# Altium PCB STM32.PcbDoc (part 2 of 6)
Units mm, origin at the board's own origin, x right, y up, seen from the top; angles counter-clockwise.
Board outline 99.69 x 99.7 mm, 2 copper layers (Top Layer, Bottom Layer); 150 components, 142 nets, 668 pads, 273 vias.
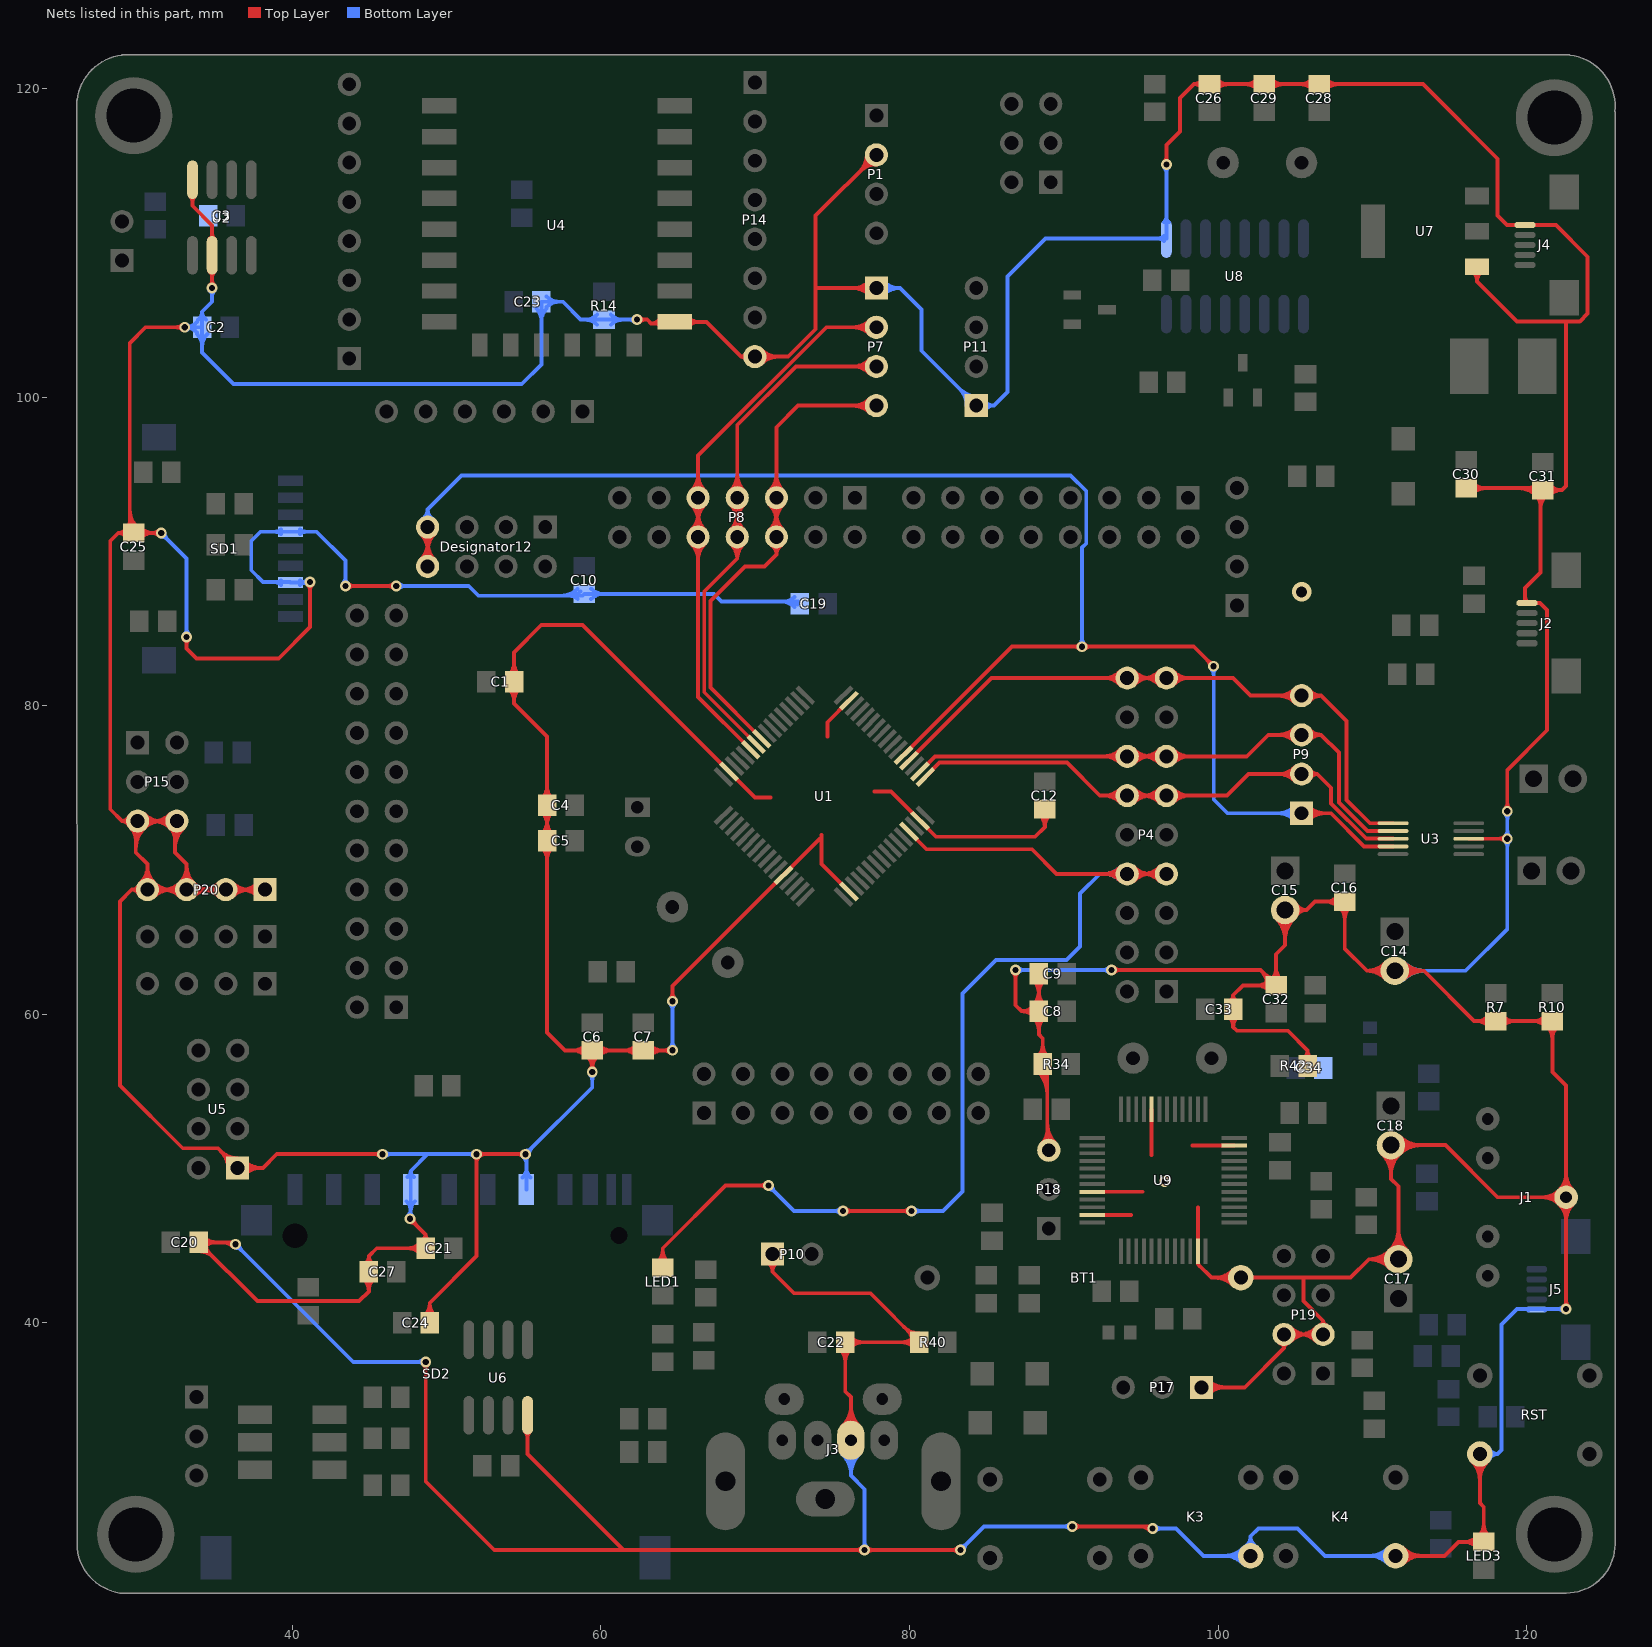
[diagram p2: the nets of this part, all layers, seen from the top]

## Via types
v1: diameter 0.7, hole 0.4, Top Layer to Bottom Layer, 272 vias
v2: diameter 1.27, hole 0.711, Top Layer to Bottom Layer, 1 vias

## Nets (pads, with @x,y where several pads share a name; then routed paths per layer and width w, separated by ;. In a path a pad name is that pad's centre, name@x,y a point inside that pad or via, vN(x,y) a via of type N, cw(c..) or ccw(c..) an arc to the next point about the centre after c; other vN are vias at no path point) (continued)
GND: BT1.2 C1.2 C2.2 C3.1 C4.1 C5.1 C6.1 C7.1 C8.1 C9.1 C10.2 C12.2 C14.2 C15.2 C16.2 C17.2 C18.2 C19.2 C20.1 C21.2 C22.1 C23.2 C24.2 C25.2 C26.2 C27.2 C28.1 C29.1 C30.1 C31.1 C32.1 C33.1 C34.1 J1.1 J2.4 J3.3 J4.4 J5.4 K3.1 K4.1 LED3.2 P1.2 P7.1 P10.1 P11.1 P14.8 P15.5 P15.6 P17.1 P18.3 P19.3 P19.4 P20.1 P20.2 P20.3 P20.4 R7.1 R10.1 R14.1 R34.1 R40.1 R42.1 RST.2 SD1.3 SD1.6 SD2.3 SD2.6 U1.12 U1.18 U1.31 U1.47 U1.63 U2.2 U2.8 U3.8 U4.8 U5.1 U6.4 U7.1 U8.1 U9.8 U9.20 U9.23 U9.35 U9.47 | length 1223.3
  Top Layer w0.25: C25.2@29.227,90.927 ccw(c28.713,90.573) 28.713,91.197 ; C25.2@29.227,91.467 cw(c28.713,91.822) 28.713,91.197 ; C25.2@29.282,91.533 ccw(c28.843,91.972) 29.464,91.972 ; P15.5@29.414,72.235 ccw(c28.956,72.004) 28.956,72.517 ; P15.5@29.414,72.799 cw(c28.956,73.03) 28.956,72.517 ; 29.464,92.112 ccw(c30.533,92.112) C25.2@29.777,91.356 ; 29.464,92.716 ccw(c31.137,92.716) C25.2@29.954,91.533 ; P15.5@29.53,72.075 cw(c28.77,71.315) 29.845,71.315 ; 29.845,70.701 cw(c31.787,70.701) 30.414,72.075 cw(c31.481,71.008) 31.481,72.517 cw(c31.481,74.026) P15.5@30.414,72.959 ; 29.845,71.305 cw(c31.184,71.305) 30.237,72.252 cw(c30.877,71.612) 30.877,72.517 cw(c30.877,73.422) P15.5@30.237,72.782 ; P20.4@30.049,67.79 ccw(c29.591,67.559) 29.591,68.072 ; P20.4@30.049,68.354 cw(c29.591,68.585) 29.591,68.072 ; C25.2@30.154,90.861 cw(c30.938,90.077) 30.938,91.186 ; C25.2@30.154,91.533 ccw(c30.991,92.37) 30.991,91.186 ; P20.4@30.165,68.514 ccw(c29.098,69.581) 30.607,69.581 ccw(c32.116,69.581) 31.049,68.514 ccw(c32.116,69.581) 32.116,68.072 ccw(c32.116,66.563) P20.4@31.049,67.63 ; P20.4@30.342,68.337 ccw(c29.702,68.977) 30.607,68.977 ccw(c31.512,68.977) 30.872,68.337 ccw(c31.512,68.977) 31.512,68.072 ccw(c31.512,67.167) P20.4@30.872,67.807 ; v1@31.337,91.027 ccw(c30.953,90.643) 30.953,91.186 ccw(c30.953,91.729) v1@31.337,91.345 ; v1(31.496,91.186) 29.729,91.186 C25.2@29.718,91.197 ; P15.6@32.07,72.959 cw(c31.003,74.026) 31.003,72.517 cw(c31.003,71.008) 32.07,72.075 cw(c31.31,71.315) 32.385,71.315 ; P15.6@32.247,72.252 ccw(c31.607,71.612) 31.607,72.517 ccw(c31.607,73.422) P15.6@32.247,72.782 ; 32.385,70.701 cw(c34.327,70.701) P15.6@32.954,72.075 ; 32.385,71.305 cw(c33.724,71.305) P15.6@32.777,72.252 ; P20.3@32.705,67.63 ccw(c31.638,66.563) 31.638,68.072 ccw(c31.638,69.581) 32.705,68.514 ccw(c31.638,69.581) 33.147,69.581 ccw(c34.656,69.581) 33.589,68.514 ccw(c34.656,69.581) 34.656,68.072 ccw(c34.656,66.563) P20.3@33.589,67.63 ; v1@32.861,104.362 ccw(c32.477,103.978) 32.477,104.521 ccw(c32.477,105.064) v1@32.861,104.68 ; P20.3@32.882,67.807 ccw(c32.242,67.167) 32.242,68.072 ccw(c32.242,68.977) 32.882,68.337 ccw(c32.242,68.977) 33.147,68.977 ccw(c34.052,68.977) 33.412,68.337 ccw(c34.052,68.977) 34.052,68.072 ccw(c34.052,67.167) P20.3@33.412,67.807 ; v1@32.988,84.296 cw(c32.604,83.912) 33.147,83.912 cw(c33.69,83.912) v1@33.306,84.296 ; v1(33.02,104.521) 30.48,104.521 29.464,103.505 29.464,91.451 C25.2@29.718,91.197 ; v1(33.147,84.455) 33.147,83.693 33.782,83.058 39.116,83.058 41.148,85.09 v1(41.148,88.011) ; U2.8@33.369,113.024 cw(c32.985,112.64) 33.528,112.64 cw(c34.071,112.64) U2.8@33.687,113.024 ; U2.8@33.528,114.083 33.528,112.395 34.798,111.125 U2.2@34.798,109.183 v1(34.798,107.061) ; C20.1@33.92,44.637 cw(c33.92,43.249) 34.902,44.23 ; C20.1@33.92,44.887 cw(c33.92,44.102) C20.1@34.475,44.657 ; C20.1@34.256,44.876 cw(c35.067,44.065) 35.067,45.212 cw(c35.067,46.359) C20.1@34.256,45.548 ; C20.1@34.395,45.112 ccw(c35.3,45.112) 34.66,44.472 ; v1@34.639,107.22 ccw(c34.255,107.604) 34.798,107.604 ccw(c35.341,107.604) v1@34.957,107.22 ; U2.2@34.639,108.124 cw(c34.255,107.74) 34.798,107.74 cw(c35.341,107.74) U2.2@34.957,108.124 ; U2.2@34.639,110.242 ccw(c34.255,110.626) 34.798,110.626 ccw(c35.341,110.626) U2.2@34.957,110.242 ; P20.2@35.245,67.63 ccw(c34.178,66.563) 34.178,68.072 ccw(c34.178,69.581) P20.2@35.245,68.514 ; P20.2@35.422,67.807 ccw(c34.782,67.167) 34.782,68.072 ccw(c34.782,68.977) P20.2@35.422,68.337 ; 35.472,45.212 cw(c35.472,44.235) v1@36.163,44.926 ; U5.1@35.824,50.038 ccw(c34.315,50.038) 35.382,51.105 ccw(c36.449,52.172) U5.1@36.449,50.663 ; P20.2@35.952,67.807 cw(c36.592,67.167) 36.592,68.072 cw(c36.592,68.977) P20.2@35.952,68.337 ; U5.1@36.074,50.038 ccw(c35.169,50.038) 35.809,50.678 ccw(c36.449,51.318) U5.1@36.449,50.413 ; P20.2@36.129,67.63 cw(c37.196,66.563) 37.196,68.072 cw(c37.196,69.581) P20.2@36.129,68.514 ; v1(36.322,45.085) 36.195,45.212 C20.1@33.92,45.212 37.73,41.402 44.323,41.402 44.958,42.037 ; U5.1@36.714,49.773 cw(c37.354,49.133) 37.354,50.038 cw(c37.354,50.943) U5.1@36.714,50.303 ; U5.1@36.891,49.596 cw(c37.958,48.529) 37.958,50.038 cw(c37.958,51.547) U5.1@36.891,50.48 ; P20.1@37.785,67.63 ccw(c36.718,66.563) 36.718,68.072 ccw(c36.718,69.581) P20.1@37.785,68.514 ; P20.1@37.962,67.807 ccw(c37.322,67.167) 37.322,68.072 ccw(c37.322,68.977) P20.1@37.962,68.337 ; P20.1@38.227,68.072 P20.2@35.687,68.072 P20.3@33.147,68.072 ; v1@40.989,87.852 cw(c40.605,87.468) 41.148,87.468 cw(c41.691,87.468) v1@41.307,87.852 ; v1(43.434,87.757) v1(46.736,87.757) ; v1@43.593,87.598 cw(c43.977,87.214) 43.977,87.757 cw(c43.977,88.3) v1@43.593,87.916 ; C27.2@44.612,42.87 cw(c43.782,42.037) 44.958,42.037 ; C27.2@44.681,43.8 ccw(c44.327,44.323) 44.958,44.323 ; C27.2@44.947,43.307 C27.2@44.958,43.318 ; 44.958,42.087 cw(c46.067,42.087) C27.2@45.283,42.871 ; C27.2@45.228,43.79 cw(c45.619,44.323) 44.958,44.323 ; v1@45.688,50.768 ccw(c45.304,50.384) 45.304,50.927 ccw(c45.304,51.47) v1@45.688,51.086 ; v1(45.847,50.927) 38.989,50.927 38.1,50.038 U5.1@36.449,50.038 35.179,51.308 32.893,51.308 28.829,55.372 28.829,67.31 29.591,68.072 ; v1@46.577,87.598 ccw(c46.193,87.214) 46.193,87.757 ccw(c46.193,88.3) v1@46.577,87.916 ; v1@47.625,46.511 cw(c47.625,45.968) 48.009,46.352 cw(c48.393,46.736) v1@47.85,46.736 ; v1(47.625,46.736) 48.63,45.731 ; C21.2@48.294,44.495 ccw(c47.483,43.684) 47.483,44.831 ccw(c47.483,45.978) C21.2@48.294,45.167 ; C21.2@48.403,45.348 ccw(c48.194,45.731) 48.63,45.731 ; v1@48.482,37.306 cw(c48.098,36.922) 48.641,36.922 cw(c49.184,36.922) v1@48.8,37.306 ; C24.2@48.57,40.441 ccw(c47.759,41.252) 48.906,41.252 ccw(c50.053,41.252) C24.2@49.242,40.441 ; v1(48.641,37.465) 48.641,29.718 53.086,25.273 61.468,25.273 ; C21.2@48.857,45.348 cw(c49.066,45.731) 48.63,45.731 ; C24.2@48.906,40.005 48.906,41.286 51.943,44.323 v1(51.943,50.927) v1(55.118,50.927) ; v1@51.784,50.768 cw(c51.4,50.384) 51.943,50.384 cw(c52.486,50.384) 52.102,50.768 cw(c52.486,50.384) 52.486,50.927 cw(c52.486,51.47) v1@52.102,51.086 ; C1.2@54.031,81.098 cw(c53.22,80.287) 54.367,80.287 cw(c55.514,80.287) C1.2@54.703,81.098 ; C1.2@54.031,81.97 ccw(c53.22,82.781) 54.367,82.781 ccw(c55.514,82.781) C1.2@54.703,81.97 ; v1@54.959,50.768 ccw(c54.575,50.384) 54.575,50.927 ccw(c54.575,51.47) v1@54.959,51.086 ; U6.4@55.086,32.94 cw(c54.702,32.556) 55.245,32.556 cw(c55.788,32.556) U6.4@55.404,32.94 ; U6.4@55.245,33.999 55.245,31.496 61.468,25.273 ; C5.1@56.168,70.811 cw(c55.357,70) 56.504,70 cw(c57.651,70) C5.1@56.84,70.811 ; C5.1@56.168,71.683 ccw(c55.357,72.494) 56.504,72.494 ccw(c57.651,72.494) C5.1@56.84,71.683 ; C4.1@56.168,73.097 cw(c55.357,72.286) 56.504,72.286 cw(c57.651,72.286) C4.1@56.84,73.097 ; C4.1@56.168,73.969 ccw(c55.357,74.78) 56.504,74.78 ccw(c57.651,74.78) C4.1@56.84,73.969 ; C6.1@59,57.311 ccw(c58.189,56.5) 58.189,57.647 ccw(c58.189,58.794) C6.1@59,57.983 ; C6.1@59.1,57.311 cw(c58.289,56.5) 59.436,56.5 cw(c60.583,56.5) C6.1@59.772,57.311 ; v1@59.277,56.42 ccw(c58.893,56.804) 59.436,56.804 ccw(c59.979,56.804) v1@59.595,56.42 ; v1(59.436,56.261) C6.1@59.436,57.647 ; C6.1@59.872,57.311 cw(c60.683,56.5) 60.683,57.647 cw(c60.683,58.794) C6.1@59.872,57.983 ; C7.1@62.302,57.311 ccw(c61.491,56.5) 61.491,57.647 ccw(c61.491,58.794) C7.1@62.302,57.983 ; v1(62.346,105.018) 63.003,105.018 63.246,104.775 ; v1@62.505,104.859 cw(c62.889,104.475) 62.889,105.018 cw(c62.889,105.561) v1@62.505,105.177 ; C7.1@63.174,57.311 cw(c63.985,56.5) 63.985,57.647 cw(c63.985,58.794) C7.1@63.174,57.983 ; 63.478,104.775 cw(c63.478,104.201) U4.8@63.884,104.607 ; U4.8@63.841,105.086 cw(c63.246,105.5) 63.246,104.775 ; 64.073,57.647 ccw(c64.073,58.228) v1@64.484,57.817 ; 64.126,57.647 cw(c64.126,57.141) v1@64.484,57.499 ; v1@64.484,60.992 ccw(c64.1,61.376) 64.643,61.376 ccw(c65.186,61.376) v1@64.802,60.992 ; v1(64.643,57.658) 64.632,57.647 C7.1@62.738,57.647 C6.1@59.436,57.647 ; v1(64.643,60.833) 64.643,61.818 U1.12@71.834,69.009 74.168,71.343 ; U4.8@64.677,104.775 63.246,104.775 ; U4.8@64.774,104.872 66.832,104.872 69.088,102.616 ; U4.8@65.664,104.607 cw(c66.304,103.967) 66.304,104.872 cw(c66.304,105.777) U4.8@65.664,105.137 ; P14.8@69.389,102.404 ccw(c69.088,102.296) 69.088,102.616 ; P14.8@69.389,102.828 cw(c69.088,102.936) 69.088,102.616 ; P14.8@70.242,102.351 cw(c70.882,101.711) 70.882,102.616 cw(c70.882,103.521) P14.8@70.242,102.881 ; P14.8@70.419,102.174 cw(c71.486,101.107) 71.486,102.616 cw(c71.486,104.125) P14.8@70.419,103.058 ; P10.1@70.783,43.924 cw(c70.387,43.307) 71.12,43.307 ; 70.993,74.041 69.984,74.041 U1.63@68.299,75.726 58.808,85.217 56.134,85.217 54.367,83.45 54.367,80.126 56.504,77.989 C4.1@56.504,73.533 C5.1@56.504,71.247 56.504,58.812 57.669,57.647 C6.1@59.436,57.647 ; P10.1@71.12,44.45 71.12,43.307 ; P10.1@71.457,43.924 ccw(c71.853,43.307) 71.12,43.307 ; 73.914,107.061 P7.1@77.851,107.061 ; 74.295,71.628 74.295,69.73 U1.18@76.077,67.948 ; 74.676,77.978 74.676,78.922 U1.47@76.077,80.323 ; C22.1@75.494,38.299 cw(c74.683,37.488) 75.83,37.488 cw(c76.977,37.488) C22.1@76.166,38.299 ; J3.3@75.66,33.306 ccw(c74.356,34.61) 76.2,34.61 ccw(c78.044,34.61) J3.3@76.74,33.306 ; J3.3@75.837,33.129 ccw(c74.959,34.007) 76.2,34.007 ccw(c77.441,34.007) J3.3@76.563,33.129 ; C22.1@76.166,38.399 cw(c76.977,37.588) 76.977,38.735 cw(c76.977,39.882) C22.1@76.166,39.071 ; J3.3@76.2,32.385 76.2,35.179 75.83,35.549 C22.1@75.83,38.735 R40.1@80.634,38.735 77.459,41.91 72.517,41.91 71.12,43.307 ; v1@76.93,25.114 ccw(c76.546,24.73) 76.546,25.273 ccw(c76.546,25.816) v1@76.93,25.432 ; P1.2@77.226,115.697 cw(c75.717,115.697) 76.784,114.63 cw(c77.851,113.563) P1.2@77.851,115.072 ; v1@77.248,25.114 cw(c77.632,24.73) 77.632,25.273 cw(c77.632,25.816) v1@77.248,25.432 ; P7.1@77.409,106.619 ccw(c76.342,105.552) 76.342,107.061 ccw(c76.342,108.57) P7.1@77.409,107.503 ; P1.2@77.476,115.697 cw(c76.571,115.697) 77.211,115.057 cw(c77.851,114.417) P1.2@77.851,115.322 ; P7.1@77.586,106.796 ccw(c76.946,106.156) 76.946,107.061 ccw(c76.946,107.966) P7.1@77.586,107.326 ; 77.724,74.422 78.795,74.422 U1.31@80.673,72.544 81.716,71.501 88.138,71.501 88.773,72.136 ; P1.2@77.851,115.697 73.914,111.76 73.914,104.394 72.136,102.616 P14.8@69.977,102.616 69.088,102.616 ; 79.652,39.717 ccw(c80.634,40.698) R40.1@80.634,39.31 ; 79.894,39.475 cw(c79.254,38.835) R40.1@80.159,38.835 ; R40.1@80.079,39.29 ccw(c80.634,39.845) R40.1@80.634,39.06 ; R40.1@80.298,38.399 ccw(c79.487,37.588) 79.487,38.735 ccw(c79.487,39.882) R40.1@80.298,39.071 ; v1@83.153,25.114 ccw(c82.769,24.73) 82.769,25.273 ccw(c82.769,25.816) v1@83.153,25.432 ; v1(83.312,25.273) v1(77.089,25.273) 61.468,25.273 ; v1@86.709,62.706 cw(c86.325,62.322) 86.868,62.322 cw(c87.411,62.322) v1@87.027,62.706 ; v1(86.868,62.865) 86.868,60.579 87.249,60.198 ; C8.1@88.042,59.865 ccw(c87.249,59.087) 87.249,60.198 ; C8.1@88.042,60.531 cw(c87.249,61.309) 87.249,60.198 ; C8.1@88.045,59.762 cw(c87.234,58.951) 88.381,58.951 cw(c89.528,58.951) C8.1@88.717,59.762 ; C8.1@88.045,60.634 ccw(c87.234,61.445) 88.381,61.445 ccw(c89.528,61.445) C8.1@88.717,60.634 ; C9.1@88.045,62.175 cw(c87.234,61.364) 88.381,61.364 cw(c89.528,61.364) C9.1@88.717,62.175 ; R34.1@88.299,56.333 cw(c86.794,54.828) 88.923,54.828 ; R34.1@88.299,57.205 ccw(c87.488,58.016) 88.635,58.016 ccw(c89.782,58.016) R34.1@88.971,57.205 ; C9.1@88.381,62.611 C8.1@88.381,60.198 ; C12.2@88.44,72.929 cw(c87.662,72.136) 88.773,72.136 ; R34.1@88.476,56.51 cw(c87.398,55.431) 88.923,55.431 ; P18.3@88.585,51.623 ccw(c87.77,52.438) 88.923,52.438 ; R34.1@88.653,56.687 cw(c88.001,56.035) 88.923,56.035 ; C12.2@88.773,73.268 88.773,72.136 ; P18.3@88.923,51.285 88.923,56.481 R34.1@88.635,56.769 88.635,58.431 88.381,58.685 C8.1@88.381,60.198 ; 88.923,52.338 ccw(c90.184,52.338) P18.3@89.292,51.446 ; 88.923,52.942 ccw(c90.788,52.942) P18.3@89.469,51.623 ; C12.2@89.106,72.929 ccw(c89.884,72.136) 88.773,72.136 ; v1(90.551,26.797) 95.631,26.797 v1(95.758,26.67) ; v1@90.71,26.638 cw(c91.094,26.254) 91.094,26.797 cw(c91.094,27.34) v1@90.71,26.956 ; U9.23@91.844,46.987 94.358,46.987 ; U9.20@91.844,48.487 95.096,48.487 ; v1(93.091,62.865) 102.754,62.865 C32.1@103.759,61.86 ; v1@93.25,62.706 cw(c93.634,62.322) 93.634,62.865 cw(c93.634,63.408) v1@93.25,63.024 ; 94.908,26.797 cw(c94.908,25.82) v1@95.599,26.511 ; 95.694,50.864 U9.8@95.694,53.837 ; v1@96.488,115.221 ccw(c96.104,115.605) 96.647,115.605 ccw(c97.19,115.605) v1@96.806,115.221 ; v1(96.647,115.062) 96.647,116.332 97.536,117.221 97.536,119.38 98.436,120.28 ; 98.35,51.487 U9.47@101.044,51.487 ; 98.694,47.483 U9.35@98.694,44.637 98.694,43.792 99.561,42.926 BT1.2@101.346,42.926 ; U9.35@98.696,43.939 ccw(c99.054,43.939) 98.801,43.686 ; P17.1@98.933,35.814 101.727,35.814 104.267,38.354 ; C26.2@98.95,120.01 ccw(c98.436,119.656) 98.436,120.28 ; C26.2@98.95,120.55 cw(c98.436,120.905) 98.436,120.28 ; P17.1@99.198,35.549 cw(c99.838,34.909) 99.838,35.814 cw(c99.838,36.719) P17.1@99.198,36.079 ; P17.1@99.375,35.372 cw(c100.442,34.305) 100.442,35.814 cw(c100.442,37.323) P17.1@99.375,36.256 ; C26.2@99.877,119.944 cw(c100.688,119.133) 100.688,120.28 cw(c100.688,121.427) C26.2@99.877,120.616 ; C33.1@100.661,59.869 cw(c100.044,59.171) 100.976,59.171 ; C33.1@100.749,60.842 ccw(c100.54,61.225) 100.976,61.225 ; BT1.2@100.977,42.43 ccw(c99.78,41.233) 99.78,42.926 ccw(c99.78,44.619) BT1.2@100.977,43.422 ; BT1.2@101.154,42.607 ccw(c100.384,41.837) 100.384,42.926 ccw(c100.384,44.015) BT1.2@101.154,43.245 ; C33.1@101.203,60.842 cw(c101.412,61.225) 100.976,61.225 ; C33.1@101.291,59.869 ccw(c101.908,59.171) 100.976,59.171 ; BT1.2@101.473,42.926 105.537,42.926 ; C29.1@102.561,119.944 ccw(c101.75,119.133) 101.75,120.28 ccw(c101.75,121.427) C29.1@102.561,120.616 ; 102.777,62.842 cw(c101.796,61.86) C32.1@103.184,61.86 ; 103.019,62.6 ccw(c103.659,63.24) C32.1@103.659,62.335 ; C32.1@103.204,62.415 cw(c102.649,61.86) C32.1@103.434,61.86 ; C32.1@103.323,61.524 ccw(c102.512,60.713) 102.512,61.86 ccw(c102.512,63.007) C32.1@103.323,62.196 ; C32.1@103.423,62.196 ccw(c102.612,63.007) 103.759,63.007 ccw(c104.906,63.007) C32.1@104.095,62.196 ; C29.1@103.433,119.944 cw(c104.244,119.133) 104.244,120.28 cw(c104.244,121.427) C29.1@103.433,120.616 ; C15.2@103.778,66.186 cw(c102.412,64.82) 104.343,64.82 cw(c106.275,64.82) C15.2@104.909,66.186 ; C15.2@103.954,66.362 cw(c103.015,65.423) 104.343,65.423 cw(c105.671,65.423) C15.2@104.732,66.362 ; P19.4@104.055,38.655 cw(c103.947,38.354) 104.267,38.354 ; P19.4@104.479,38.655 ccw(c104.587,38.354) 104.267,38.354 ; P19.4@104.532,38.978 cw(c105.172,38.338) 105.172,39.243 cw(c105.172,40.148) P19.4@104.532,39.508 ; P19.4@104.709,38.801 cw(c105.776,37.734) 105.776,39.243 cw(c105.776,40.752) P19.4@104.709,39.685 ; C15.2@104.818,66.473 cw(c105.304,66.188) 105.304,66.751 cw(c105.304,67.315) C15.2@104.818,67.03 ; C15.2@105.033,66.346 cw(c105.74,65.932) 105.74,66.751 ; C15.2@105.033,67.156 ccw(c105.74,67.571) 105.74,66.751 ; R42.1@105.532,57.133 ccw(c105.177,57.647) 105.802,57.647 ; R42.1@105.802,56.642 105.802,57.647 ; R42.1@106.072,57.133 cw(c106.427,57.647) 105.802,57.647 ; C28.1@106.117,119.944 ccw(c105.306,119.133) 105.306,120.28 ccw(c105.306,121.427) C28.1@106.117,120.616 ; P19.3@106.365,38.801 ccw(c105.298,37.734) 105.298,39.243 ccw(c105.298,40.752) P19.3@106.365,39.685 ; P19.3@106.542,38.978 ccw(c105.902,38.338) 105.902,39.243 ccw(c105.902,40.148) P19.3@106.542,39.508 ; P19.3@106.595,39.831 ccw(c106.487,40.132) 106.807,40.132 ; C28.1@106.989,119.944 cw(c107.8,119.133) 107.8,120.28 cw(c107.8,121.427) C28.1@106.989,120.616 ; P19.3@107.019,39.831 cw(c107.127,40.132) 106.807,40.132 ; C16.2@107.768,66.963 ccw(c106.957,66.152) 106.957,67.299 ccw(c106.957,68.446) C16.2@107.768,67.635 ; C16.2@107.868,66.963 cw(c107.057,66.152) 108.204,66.152 cw(c109.351,66.152) C16.2@108.54,66.963 ; C18.2@110.636,50.946 cw(c109.27,49.58) 111.201,49.58 cw(c113.133,49.58) 111.767,50.946 cw(c113.133,49.58) 113.133,51.511 cw(c113.133,53.443) C18.2@111.767,52.077 ; C18.2@110.812,51.122 cw(c109.873,50.183) 111.201,50.183 cw(c112.529,50.183) 111.59,51.122 cw(c112.529,50.183) 112.529,51.511 cw(c112.529,52.839) C18.2@111.59,51.9 ; C14.2@110.862,62.277 ccw(c109.652,61.182) 109.652,62.814 ; C14.2@110.862,63.351 cw(c109.652,64.447) 109.652,62.814 ; C14.2@111.047,62.445 ccw(c110.215,61.692) 110.215,62.814 ccw(c110.215,63.937) C14.2@111.047,63.183 ; C17.2@111.113,43.56 ccw(c109.779,42.252) 109.779,44.12 ; C17.2@111.113,44.68 cw(c109.779,45.988) 109.779,44.12 ; C17.2@111.118,44.685 ccw(c109.752,46.051) 111.684,46.051 ccw(c113.615,46.051) C17.2@112.249,44.685 ; C17.2@111.291,43.735 ccw(c110.374,42.836) 110.374,44.12 ccw(c110.374,45.404) C17.2@111.291,44.505 ; C17.2@111.295,44.509 ccw(c110.356,45.448) 111.684,45.448 ccw(c113.012,45.448) C17.2@112.073,44.509 ; K4.1@111.506,24.892 114.681,24.892 115.581,25.792 LED3.2@117.221,25.792 117.221,28.067 116.967,28.321 RST.2@116.967,31.496 ; K4.1@111.825,24.573 cw(c112.595,23.803) 112.595,24.892 cw(c112.595,25.981) K4.1@111.825,25.211 ; C14.2@111.852,62.433 cw(c112.747,61.571) 112.747,62.814 cw(c112.747,64.057) C14.2@111.852,63.195 ; K4.1@112.002,24.396 cw(c113.199,23.199) 113.199,24.892 cw(c113.199,26.585) K4.1@112.002,25.388 ; C14.2@112.032,62.26 cw(c113.335,61.006) 113.335,62.814 ; C14.2@112.032,63.369 ccw(c113.335,64.622) 113.335,62.814 ; C30.1@116.078,94.096 120.904,94.096 120.904,88.628 119.887,87.611 J2.4@119.887,86.772 ; U3.8@116.242,71.374 v1(118.745,71.374) ; RST.2@116.471,31 cw(c115.274,29.803) 116.967,29.803 cw(c118.66,29.803) RST.2@117.463,31 ; U7.1@116.503,108.127 cw(c115.941,107.496) 116.786,107.496 ; C30.1@116.514,93.76 cw(c117.325,92.949) 117.325,94.096 cw(c117.325,95.243) C30.1@116.514,94.432 ; RST.2@116.648,31.177 cw(c115.878,30.407) 116.967,30.407 cw(c118.056,30.407) RST.2@117.286,31.177 ; LED3.2@116.785,25.456 ccw(c115.974,24.645) 115.974,25.792 ccw(c115.974,26.939) LED3.2@116.785,26.128 ; U7.1@116.786,108.444 116.786,107.496 ; LED3.2@116.885,26.128 ccw(c116.074,26.939) 117.221,26.939 ccw(c118.368,26.939) LED3.2@117.557,26.128 ; U7.1@117.069,108.127 ccw(c117.631,107.496) 116.786,107.496 ; R7.1@117.547,59.216 ccw(c116.736,58.405) 116.736,59.552 ccw(c116.736,60.699) R7.1@117.547,59.888 ; R7.1@118.419,59.216 cw(c119.23,58.405) 119.23,59.552 cw(c119.23,60.699) R7.1@118.419,59.888 ; v1@118.586,71.215 ccw(c118.202,70.831) 118.202,71.374 ccw(c118.202,71.917) v1@118.586,71.533 ; v1@118.586,73.311 ccw(c118.202,73.695) 118.745,73.695 ccw(c119.288,73.695) v1@118.904,73.311 ; v1(118.745,73.152) 118.745,75.819 121.328,78.402 121.328,86.19 120.874,86.644 J2.4@120.015,86.644 ; 119.478,94.096 cw(c119.478,92.516) 120.595,93.633 cw(c119.849,92.887) 120.904,92.887 ; 119.887,87.134 ccw(c120.505,87.134) J2.4@120.068,86.697 ; 120.081,94.096 cw(c120.081,93.119) C31.1@120.772,93.81 ; 120.091,94.096 ccw(c120.091,94.809) C31.1@120.595,94.305 ; 120.904,92.757 cw(c122.143,92.757) C31.1@121.267,93.633 ; 120.904,93.361 cw(c121.539,93.361) C31.1@121.09,93.81 ; C31.1@121.031,93.969 122.29,93.969 122.555,94.234 122.555,104.902 ; R10.1@121.23,59.216 ccw(c120.419,58.405) 120.419,59.552 ccw(c120.419,60.699) R10.1@121.23,59.888 ; R10.1@121.33,59.216 cw(c120.519,58.405) 121.666,58.405 cw(c122.813,58.405) R10.1@122.002,59.216 ; C31.1@121.467,93.633 cw(c122.278,92.822) 122.278,93.969 cw(c122.278,95.116) C31.1@121.467,94.305 ; v1@122.396,41.053 ccw(c122.012,41.437) 122.555,41.437 ccw(c123.098,41.437) v1@122.714,41.053 ; v1(122.555,40.894) J1.1@122.555,48.133 ; J1.1@122.829,47.859 ccw(c123.489,47.199) 122.555,47.199 ccw(c121.621,47.199) 122.281,47.859 ccw(c121.621,47.199) 121.621,48.133 ccw(c121.621,49.067) 122.281,48.407 ccw(c121.621,49.067) 122.555,49.067 ccw(c123.489,49.067) J1.1@122.829,48.407 ; J1.1@123.005,47.683 ccw(c124.093,46.595) 122.555,46.595 ccw(c121.017,46.595) 122.105,47.683 ccw(c121.017,46.595) 121.017,48.133 ccw(c121.017,49.671) 122.105,48.583 ccw(c121.017,49.671) 122.555,49.671 ccw(c124.093,49.671) J1.1@123.005,48.583 ; 28.713,91.197 C25.2@29.718,91.197 ; 28.713,91.197 28.194,90.678 28.194,73.279 28.956,72.517 ; 28.956,72.517 P15.5@29.972,72.517 ; 29.591,68.072 P20.4@30.607,68.072 ; P15.5@29.972,72.517 29.845,72.39 29.845,70.485 30.607,69.723 P20.4@30.607,68.072 ; P15.5@29.972,72.517 P15.6@32.512,72.517 32.385,72.39 32.385,70.485 33.147,69.723 P20.3@33.147,68.072 ; P20.4@30.607,68.072 P20.3@33.147,68.072 ; 44.958,42.037 C27.2@44.958,43.318 ; C27.2@44.958,43.318 44.958,44.323 ; 44.958,44.323 45.466,44.831 C21.2@48.63,44.831 48.63,45.731 ; 87.249,60.198 C8.1@88.381,60.198 ; 98.436,120.28 C26.2@99.441,120.28 C28.1@106.553,120.28 113.273,120.28 118.11,115.443 118.11,111.76 118.715,111.155 J4.4@119.888,111.155 121.89,111.155 123.952,109.093 123.952,105.41 123.444,104.902 122.555,104.902 ; 100.976,59.171 101.219,58.928 104.521,58.928 105.802,57.647 ; 100.976,59.171 C33.1@100.976,60.325 100.976,61.225 ; 100.976,61.225 101.611,61.86 C32.1@103.759,61.86 ; C32.1@103.759,61.86 103.759,63.881 104.343,64.465 C15.2@104.343,66.751 105.74,66.751 ; 104.267,38.354 P19.4@104.267,39.243 P19.3@106.807,39.243 106.807,40.132 ; 105.537,42.926 108.585,42.926 109.779,44.12 ; 105.537,42.926 105.537,41.402 106.807,40.132 ; 105.74,66.751 106.288,67.299 C16.2@108.204,67.299 108.204,64.262 109.652,62.814 ; 109.652,62.814 C14.2@111.455,62.814 113.335,62.814 ; 109.779,44.12 C17.2@111.684,44.12 111.684,48.844 111.201,49.327 C18.2@111.201,51.511 114.732,51.511 118.11,48.133 J1.1@122.555,48.133 ; 113.335,62.814 116.597,59.552 R7.1@117.983,59.552 R10.1@121.666,59.552 121.666,56.261 122.555,55.372 J1.1@122.555,48.133 ; 116.786,107.496 119.38,104.902 122.555,104.902
  Bottom Layer w0.25: v1@31.496,90.961 cw(c31.496,90.418) 31.88,90.802 cw(c32.264,91.186) v1@31.721,91.186 ; v1(31.496,91.186) 33.147,89.535 v1(33.147,84.455) ; v1@32.988,84.614 ccw(c32.604,84.998) 33.147,84.998 ccw(c33.69,84.998) v1@33.306,84.614 ; v1@33.179,104.362 cw(c33.563,103.978) 33.563,104.521 cw(c33.563,105.064) v1@33.179,104.68 ; C2.2@33.813,104.188 ccw(c33.02,103.41) v1(33.02,104.521) ; C2.2@33.813,104.854 cw(c33.02,105.632) v1(33.02,104.521) ; C2.2@33.816,104.085 cw(c33.005,103.274) 34.152,103.274 cw(c35.299,103.274) C2.2@34.488,104.085 ; C2.2@33.882,105.012 ccw(c33.528,105.526) 34.152,105.526 ; C2.2@34.422,105.012 cw(c34.776,105.526) 34.152,105.526 ; v1@34.639,106.902 cw(c34.255,106.518) 34.798,106.518 cw(c35.341,106.518) v1@34.957,106.902 ; v1(34.798,107.061) 34.798,106.172 34.152,105.526 ; v1@36.322,44.86 cw(c36.322,44.317) 36.706,44.701 cw(c37.09,45.085) v1@36.547,45.085 ; v1(36.322,45.085) 43.942,37.465 v1(48.641,37.465) ; 38.786,88.011 cw(c38.786,87.328) SD1.6@39.269,87.811 ; 38.984,88.011 ccw(c38.984,88.414) SD1.6@39.269,88.129 ; SD1.3@39.269,91.111 ccw(c38.885,90.727) 38.885,91.27 ccw(c38.885,91.813) SD1.3@39.269,91.429 ; SD1.6@40.487,87.811 cw(c40.871,87.427) 40.871,87.97 cw(c40.871,88.513) SD1.6@40.487,88.129 ; SD1.3@40.487,91.111 cw(c40.871,90.727) 40.871,91.27 cw(c40.871,91.813) SD1.3@40.487,91.429 ; SD1.6@40.506,87.97 ccw(c40.506,88.653) v1@40.989,88.17 ; 40.704,87.97 cw(c40.704,87.567) v1@40.989,87.852 ; v1(41.148,88.011) 41.107,87.97 SD1.6@39.878,87.97 39.837,88.011 38.1,88.011 37.338,88.773 37.338,90.678 37.93,91.27 SD1.3@39.878,91.27 41.572,91.27 43.434,89.408 v1(43.434,87.757) ; v1@43.275,87.916 ccw(c42.891,88.3) 43.434,88.3 ccw(c43.977,88.3) v1@43.593,87.916 ; v1(45.847,50.927) 48.768,50.927 ; v1@46.006,50.768 cw(c46.39,50.384) 46.39,50.927 cw(c46.39,51.47) v1@46.006,51.086 ; v1(46.736,87.757) 51.435,87.757 52.07,87.122 58.812,87.122 C10.2@58.928,87.238 67.321,87.238 67.818,86.741 72.76,86.741 C19.2@72.887,86.614 ; v1@46.895,87.598 cw(c47.279,87.214) 47.279,87.757 cw(c47.279,88.3) v1@46.895,87.916 ; SD2.3@47.407,47.876 cw(c46.767,47.236) 47.672,47.236 cw(c48.577,47.236) SD2.3@47.937,47.876 ; v1@47.466,46.895 ccw(c46.968,47.393) 47.672,47.393 ; SD2.3@47.468,49.456 ccw(c47.225,49.831) 47.672,49.831 ; v1(47.625,46.736) 47.672,46.783 SD2.3@47.672,48.641 47.672,49.831 ; 47.672,47.166 ccw(c48.055,47.166) v1@47.784,46.895 ; SD2.3@47.876,49.456 cw(c48.119,49.831) 47.672,49.831 ; v1@48.482,37.306 ccw(c48.098,36.922) 48.098,37.465 ccw(c48.098,38.008) v1@48.482,37.624 ; v1@51.784,50.768 ccw(c51.4,50.384) 51.4,50.927 ccw(c51.4,51.47) v1@51.784,51.086 ; v1(51.943,50.927) 48.768,50.927 ; SD2.6@54.907,49.406 ccw(c54.267,50.046) 55.172,50.046 ccw(c56.077,50.046) SD2.6@55.437,49.406 ; v1@54.959,50.768 cw(c54.444,50.253) 55.172,50.253 ; v1@55.118,51.152 ccw(c55.118,51.695) 55.502,51.311 ccw(c55.886,50.927) v1@55.343,50.927 ; SD2.6@55.172,48.641 55.172,50.873 v1(55.118,50.927) 59.436,55.245 v1(59.436,56.261) ; 55.172,50.514 cw(c55.531,50.514) v1@55.277,50.768 ; C23.2@55.809,105.736 cw(c54.998,104.925) 56.145,104.925 cw(c57.292,104.925) C23.2@56.481,105.736 ; C23.2@56.481,105.836 cw(c57.292,105.025) 57.292,106.172 cw(c57.292,107.319) C23.2@56.481,106.508 ; 57.401,87.122 ccw(c57.401,88.665) C10.2@58.492,87.574 ; 57.961,87.122 cw(c57.961,86.371) C10.2@58.492,86.902 ; 58.005,87.122 ccw(c58.005,88.061) C10.2@58.669,87.397 ; v1@59.277,56.102 cw(c58.893,55.718) 59.436,55.718 cw(c59.979,55.718) v1@59.595,56.102 ; C10.2@59.364,86.902 cw(c60.175,86.091) 60.175,87.238 cw(c60.175,88.385) C10.2@59.364,87.574 ; R14.1@59.762,104.682 ccw(c58.951,103.871) 58.951,105.018 ccw(c58.951,106.165) R14.1@59.762,105.354 ; R14.1@60.634,104.682 cw(c61.445,103.871) 61.445,105.018 cw(c61.445,106.165) R14.1@60.634,105.354 ; v1@62.187,104.859 ccw(c61.803,104.475) 61.803,105.018 ccw(c61.803,105.561) v1@62.187,105.177 ; v1(62.346,105.018) R14.1@60.198,105.018 58.685,105.018 57.531,106.172 C23.2@56.145,106.172 56.145,102.119 54.864,100.838 36.195,100.838 34.152,102.881 C2.2@34.152,104.521 ; v1@64.484,57.817 ccw(c64.1,58.201) 64.643,58.201 ccw(c65.186,58.201) v1@64.802,57.817 ; v1@64.484,60.674 cw(c64.1,60.29) 64.643,60.29 cw(c65.186,60.29) v1@64.802,60.674 ; v1(64.643,57.658) v1(64.643,60.833) ; 71.675,86.741 cw(c71.675,85.502) C19.2@72.551,86.378 ; 71.805,86.741 ccw(c71.805,87.796) C19.2@72.551,87.05 ; 72.279,86.741 cw(c72.279,86.106) C19.2@72.728,86.555 ; J3.3@75.66,31.464 cw(c74.356,30.16) 76.2,30.16 cw(c78.044,30.16) J3.3@76.74,31.464 ; J3.3@75.837,31.641 cw(c74.959,30.763) 76.2,30.763 cw(c77.441,30.763) J3.3@76.563,31.641 ; J3.3@76.2,32.385 76.2,30.099 77.089,29.21 v1(77.089,25.273) ; v1@76.93,25.432 ccw(c76.546,25.816) 77.089,25.816 ccw(c77.632,25.816) v1@77.248,25.432 ; P7.1@77.851,107.061 79.375,107.061 80.772,105.664 80.772,102.997 P11.1@84.328,99.441 85.471,99.441 ; P7.1@78.116,106.796 cw(c78.756,106.156) 78.756,107.061 cw(c78.756,107.966) P7.1@78.116,107.326 ; P7.1@78.293,106.619 cw(c79.36,105.552) 79.36,107.061 cw(c79.36,108.57) P7.1@78.293,107.503 ; v1(83.312,25.273) 84.836,26.797 v1(90.551,26.797) ; v1@83.312,25.498 ccw(c83.312,26.041) 83.696,25.657 ccw(c84.08,25.273) v1@83.537,25.273 ; P11.1@83.703,99.441 ccw(c82.194,99.441) 83.261,100.508 ccw(c84.328,101.575) P11.1@84.328,100.066 ; P11.1@83.953,99.441 ccw(c83.048,99.441) 83.688,100.081 ccw(c84.328,100.721) P11.1@84.328,99.816 ; P11.1@84.854,99.104 cw(c85.471,98.708) 85.471,99.441 ; P11.1@84.854,99.778 ccw(c85.471,100.174) 85.471,99.441 ; v1(86.868,62.865) v1(93.091,62.865) ; v1@87.027,62.706 cw(c87.411,62.322) 87.411,62.865 cw(c87.411,63.408) v1@87.027,63.024 ; v1@90.392,26.638 ccw(c90.008,26.254) 90.008,26.797 ccw(c90.008,27.34) v1@90.392,26.956 ; v1@92.932,62.706 ccw(c92.548,62.322) 92.548,62.865 ccw(c92.548,63.408) v1@92.932,63.024 ; v1(95.758,26.67) 97.282,26.67 99.06,24.892 K3.1@102.108,24.892 102.108,26.162 ; v1@95.917,26.511 cw(c96.301,26.127) 96.301,26.67 cw(c96.301,27.213) v1@95.917,26.829 ; U8.1@96.488,110.114 ccw(c96.104,109.73) 96.104,110.273 ccw(c96.104,110.816) U8.1@96.488,110.432 ; U8.1@96.488,111.332 ccw(c96.104,111.716) 96.647,111.716 ccw(c97.19,111.716) U8.1@96.806,111.332 ; v1@96.488,114.903 cw(c96.104,114.519) 96.647,114.519 cw(c97.19,114.519) v1@96.806,114.903 ; v1(96.647,115.062) U8.1@96.647,110.273 88.81,110.273 86.36,107.823 86.36,100.33 85.471,99.441 ; K3.1@101.612,24.396 ccw(c100.415,23.199) 100.415,24.892 ccw(c100.415,26.585) K3.1@101.612,25.388 ; K3.1@101.734,25.485 ccw(c101.309,26.162) 102.108,26.162 ; K3.1@101.789,24.573 ccw(c101.019,23.803) 101.019,24.892 ccw(c101.019,25.981) K3.1@101.789,25.211 ; K3.1@102.482,25.485 cw(c102.907,26.162) 102.108,26.162 ; K4.1@111.01,24.396 ccw(c109.813,23.199) 109.813,24.892 ccw(c109.813,26.585) K4.1@111.01,25.388 ; K4.1@111.187,24.573 ccw(c110.417,23.803) 110.417,24.892 ccw(c110.417,25.981) K4.1@111.187,25.211 ; C14.2@111.455,62.814 116.027,62.814 118.745,65.532 v1(118.745,71.374) v1(118.745,73.152) ; K4.1@111.506,24.892 106.934,24.892 105.156,26.67 102.616,26.67 102.108,26.162 ; C14.2@111.844,62.425 cw(c112.783,61.486) 112.783,62.814 cw(c112.783,64.142) C14.2@111.844,63.203 ; C14.2@112.021,62.249 cw(c113.387,60.883) 113.387,62.814 cw(c113.387,64.746) C14.2@112.021,63.38 ; RST.2@116.967,31.496 118.11,31.496 ; RST.2@117.592,31.178 cw(c118.11,30.915) 118.11,31.496 ; RST.2@117.592,31.814 ccw(c118.11,32.077) 118.11,31.496 ; v1@118.586,71.215 cw(c118.202,70.831) 118.745,70.831 cw(c119.288,70.831) v1@118.904,71.215 ; v1@118.586,71.533 ccw(c118.202,71.917) 118.745,71.917 ccw(c119.288,71.917) v1@118.904,71.533 ; v1@118.586,72.993 cw(c118.202,72.609) 118.745,72.609 cw(c119.288,72.609) v1@118.904,72.993 ; 119.922,40.894 cw(c119.922,40.611) J5.4@120.122,40.811 ; J5.4@121.178,40.811 cw(c121.378,40.611) 121.378,40.894 ; v1@122.396,40.735 ccw(c122.012,40.351) 122.012,40.894 ccw(c122.012,41.437) v1@122.396,41.053 ; v1(122.555,40.894) 119.38,40.894 118.364,39.878 118.364,31.75 118.11,31.496 ; v1(33.02,104.521) C2.2@34.152,104.521 ; C2.2@34.152,104.521 34.152,105.526 ; 47.672,49.831 48.768,50.927
  other v1: 96.52,49.149
  other v2: 105.41,87.376
"I2C SCL": P7.3 P8.7 P8.8 U1.58 | length 52.1
  Top Layer w0.25: P8.8@68.392,91.374 ccw(c67.325,92.441) 68.834,92.441 ccw(c70.343,92.441) P8.8@69.276,91.374 ; P8.7@68.392,93.03 cw(c67.325,91.963) 68.834,91.963 cw(c70.343,91.963) P8.7@69.276,93.03 ; P8.7@68.392,93.914 ccw(c67.325,94.981) 68.834,94.981 ccw(c70.343,94.981) P8.7@69.276,93.914 ; P8.8@68.417,90.466 cw(c67.585,89.535) 68.834,89.535 ; P8.8@68.569,91.197 ccw(c67.929,91.837) 68.834,91.837 ccw(c69.739,91.837) P8.8@69.099,91.197 ; P8.7@68.569,93.207 cw(c67.929,92.567) 68.834,92.567 cw(c69.739,92.567) P8.7@69.099,93.207 ; P8.7@68.569,93.737 ccw(c67.929,94.377) 68.834,94.377 ccw(c69.739,94.377) P8.7@69.099,93.737 ; P8.8@68.584,90.652 cw(c68.085,90.094) 68.834,90.094 cw(c69.583,90.094) P8.8@69.084,90.652 ; P8.8@69.251,90.466 ccw(c70.083,89.535) 68.834,89.535 ; U1.58@70.066,77.494 66.698,80.862 66.698,87.399 68.834,89.535 ; P7.3@77.409,101.539 ccw(c76.342,100.472) 76.342,101.981 ccw(c76.342,103.49) P7.3@77.409,102.423 ; P7.3@77.586,101.716 ccw(c76.946,101.076) 76.946,101.981 ccw(c76.946,102.886) P7.3@77.586,102.246 ; P7.3@77.851,101.981 72.639,101.981 68.834,98.176 P8.7@68.834,93.472 P8.8@68.834,90.932 68.834,89.535
"I2C SDA": P7.2 P8.9 P8.10 U1.59 | length 54.4
  Top Layer w0.25: P8.10@65.852,91.374 ccw(c64.785,92.441) 66.294,92.441 ccw(c67.803,92.441) P8.10@66.736,91.374 ; P8.9@65.852,93.03 cw(c64.785,91.963) 66.294,91.963 cw(c67.803,91.963) P8.9@66.736,93.03 ; P8.9@65.852,93.914 ccw(c64.785,94.981) 66.294,94.981 ccw(c67.803,94.981) P8.9@66.736,93.914 ; P8.10@66.029,91.197 ccw(c65.389,91.837) 66.294,91.837 ccw(c67.199,91.837) P8.10@66.559,91.197 ; P8.9@66.029,93.207 cw(c65.389,92.567) 66.294,92.567 cw(c67.199,92.567) P8.9@66.559,93.207 ; P8.9@66.029,93.737 ccw(c65.389,94.377) 66.294,94.377 ccw(c67.199,94.377) P8.9@66.559,93.737 ; P8.10@66.294,90.932 P8.9@66.294,93.472 66.294,96.205 74.61,104.521 P7.2@77.851,104.521 ; P7.2@77.409,104.079 ccw(c76.342,103.012) 76.342,104.521 ccw(c76.342,106.03) P7.2@77.409,104.963 ; P7.2@77.586,104.256 ccw(c76.946,103.616) 76.946,104.521 ccw(c76.946,105.426) P7.2@77.586,104.786
  Top Layer w0.254: P8.10@65.853,90.491 cw(c64.79,89.428) 66.294,89.428 cw(c67.798,89.428) P8.10@66.735,90.491 ; P8.10@66.033,90.671 cw(c65.403,90.041) 66.294,90.041 cw(c67.185,90.041) P8.10@66.555,90.671 ; P8.10@66.294,90.932 66.294,80.559 U1.59@69.713,77.141
"I2C SMBA": P7.4 P8.5 P8.6 U1.57 | length 47.8
  Top Layer w0.25: U1.57@70.42,77.848 67.101,81.167 67.101,86.786 69.342,89.027 70.612,89.027 71.374,89.789 ; P8.6@70.932,91.374 ccw(c69.865,92.441) 71.374,92.441 ccw(c72.883,92.441) P8.6@71.816,91.374 ; P8.5@70.932,93.03 cw(c69.865,91.963) 71.374,91.963 cw(c72.883,91.963) P8.5@71.816,93.03 ; P8.5@70.932,93.914 ccw(c69.865,94.981) 71.374,94.981 ccw(c72.883,94.981) P8.5@71.816,93.914 ; P8.6@71.037,90.406 cw(c70.641,89.789) 71.374,89.789 ; P8.6@71.109,91.197 ccw(c70.469,91.837) 71.374,91.837 ccw(c72.279,91.837) P8.6@71.639,91.197 ; P8.5@71.109,93.207 cw(c70.469,92.567) 71.374,92.567 cw(c72.279,92.567) P8.5@71.639,93.207 ; P8.5@71.109,93.737 ccw(c70.469,94.377) 71.374,94.377 ccw(c72.279,94.377) P8.5@71.639,93.737 ; P8.6@71.711,90.406 ccw(c72.107,89.789) 71.374,89.789 ; P7.4@77.409,98.999 ccw(c76.342,97.932) 76.342,99.441 ccw(c76.342,100.95) P7.4@77.409,99.883 ; P7.4@77.586,99.176 ccw(c76.946,98.536) 76.946,99.441 ccw(c76.946,100.346) P7.4@77.586,99.706 ; P7.4@77.851,99.441 72.771,99.441 71.374,98.044 P8.5@71.374,93.472 P8.6@71.374,90.932 71.374,89.789
"I2S CK": P4.13 P4.14 P9.3 U1.34 U3.2 | length 57.9
  Top Layer w0.25: P4.14@94.107,76.708 P4.13@96.647,76.708 101.854,76.708 103.251,78.105 P9.3@105.41,78.105 ; P4.14@94.372,76.443 cw(c95.012,75.803) 95.012,76.708 cw(c95.012,77.613) P4.14@94.372,76.973 ; P4.14@94.549,76.266 cw(c95.616,75.199) 95.616,76.708 cw(c95.616,78.217) P4.14@94.549,77.15 ; P4.13@96.205,76.266 ccw(c95.138,75.199) 95.138,76.708 ccw(c95.138,78.217) P4.13@96.205,77.15 ; P4.13@96.382,76.443 ccw(c95.742,75.803) 95.742,76.708 ccw(c95.742,77.613) P4.13@96.382,76.973 ; P4.13@96.912,76.443 cw(c97.552,75.803) 97.552,76.708 cw(c97.552,77.613) P4.13@96.912,76.973 ; P4.13@97.089,76.266 cw(c98.156,75.199) 98.156,76.708 cw(c98.156,78.217) P4.13@97.089,77.15 ; P9.3@104.968,77.663 ccw(c103.901,76.596) 103.901,78.105 ccw(c103.901,79.614) P9.3@104.968,78.547 ; P9.3@105.145,77.84 ccw(c104.505,77.2) 104.505,78.105 ccw(c104.505,79.01) P9.3@105.145,78.37
  Top Layer w0.254: U1.34@80.673,75.726 81.655,76.708 P4.14@94.107,76.708 ; P4.14@93.666,76.267 ccw(c92.603,75.204) 92.603,76.708 ccw(c92.603,78.212) P4.14@93.666,77.149 ; P4.14@93.846,76.447 ccw(c93.216,75.817) 93.216,76.708 ccw(c93.216,77.599) P4.14@93.846,76.969 ; P9.3@105.41,78.105 106.68,78.105 ; P9.3@105.702,77.879 cw(c106.162,77.523) 106.162,78.105 cw(c106.162,78.687) P9.3@105.702,78.331 ; P9.3@105.903,77.724 cw(c106.68,77.122) 106.68,78.105 ; P9.3@105.903,78.486 ccw(c106.68,79.088) 106.68,78.105 ; U3.2@111.342,71.874 109.676,71.874 107.823,73.727 107.823,76.962 106.68,78.105
"I2S MCK": Designator12.7 Designator12.8 P9.1 U1.37 U3.4 | length 123.8
  Top Layer w0.25: Designator12.8@48.326,89.469 ccw(c47.259,90.536) 48.768,90.536 ccw(c50.277,90.536) Designator12.8@49.21,89.469 ; Designator12.7@48.326,91.125 cw(c47.259,90.058) 48.768,90.058 cw(c50.277,90.058) Designator12.7@49.21,91.125 ; Designator12.8@48.503,89.292 ccw(c47.863,89.932) 48.768,89.932 ccw(c49.673,89.932) Designator12.8@49.033,89.292 ; Designator12.7@48.503,91.302 cw(c47.863,90.662) 48.768,90.662 cw(c49.673,90.662) Designator12.7@49.033,91.302 ; Designator12.8@48.768,89.027 Designator12.7@48.768,91.567 ; v1(91.186,83.82) 98.425,83.82 v1(99.695,82.55) ; v1@91.345,83.661 cw(c91.729,83.277) 91.729,83.82 cw(c91.729,84.363) v1@91.345,83.979 ; v1@99.47,82.55 ccw(c98.927,82.55) 99.311,82.934 ccw(c99.695,83.318) v1@99.695,82.775 ; P9.1@105.41,73.025 107.315,73.025 109.466,70.874 U3.4@111.342,70.874 ; P9.1@105.675,72.76 cw(c106.315,72.12) 106.315,73.025 cw(c106.315,73.93) P9.1@105.675,73.29 ; P9.1@105.852,72.583 cw(c106.919,71.516) 106.919,73.025 cw(c106.919,74.534) P9.1@105.852,73.467
  Top Layer w0.254: U1.37@79.612,76.787 86.645,83.82 v1(91.186,83.82) ; v1@91.028,83.662 ccw(c90.648,83.282) 90.648,83.82 ccw(c90.648,84.358) v1@91.028,83.978
  Bottom Layer w0.25: v1@99.536,82.391 cw(c99.1,81.955) 99.716,81.955 ; v1(99.695,82.55) 99.716,82.529 99.716,73.914 100.605,73.025 P9.1@105.41,73.025 ; 99.716,82.058 cw(c100.187,82.058) v1@99.854,82.391 ; P9.1@104.968,72.583 ccw(c103.901,71.516) 103.901,73.025 ccw(c103.901,74.534) P9.1@104.968,73.467 ; P9.1@105.145,72.76 ccw(c104.505,72.12) 104.505,73.025 ccw(c104.505,73.93) P9.1@105.145,73.29
  Bottom Layer w0.254: Designator12.7@48.43,92.091 ccw(c48.031,92.71) 48.768,92.71 ; Designator12.7@48.768,91.567 48.768,92.71 ; Designator12.7@49.106,92.091 cw(c49.505,92.71) 48.768,92.71 ; v1@91.028,83.978 ccw(c90.648,84.358) 91.186,84.358 ccw(c91.724,84.358) v1@91.344,83.978 ; v1(91.186,83.82) 91.186,90.238 91.453,90.506 91.453,93.898 90.444,94.908 50.966,94.908 48.768,92.71
"I2S SD": P4.17 P4.18 P9.4 U1.36 U3.1 | length 62.3
  Top Layer w0.25: U1.36@79.966,76.434 85.32,81.788 P4.18@94.107,81.788 P4.17@96.647,81.788 100.965,81.788 102.108,80.645 P9.4@105.41,80.645 106.68,80.645 ; P4.18@93.665,81.346 ccw(c92.598,80.279) 92.598,81.788 ccw(c92.598,83.297) P4.18@93.665,82.23 ; P4.18@93.842,81.523 ccw(c93.202,80.883) 93.202,81.788 ccw(c93.202,82.693) P4.18@93.842,82.053 ; P4.18@94.372,81.523 cw(c95.012,80.883) 95.012,81.788 cw(c95.012,82.693) P4.18@94.372,82.053 ; P4.18@94.549,81.346 cw(c95.616,80.279) 95.616,81.788 cw(c95.616,83.297) P4.18@94.549,82.23 ; P4.17@96.205,81.346 ccw(c95.138,80.279) 95.138,81.788 ccw(c95.138,83.297) P4.17@96.205,82.23 ; P4.17@96.382,81.523 ccw(c95.742,80.883) 95.742,81.788 ccw(c95.742,82.693) P4.17@96.382,82.053 ; P4.17@96.912,81.523 cw(c97.552,80.883) 97.552,81.788 cw(c97.552,82.693) P4.17@96.912,82.053 ; P4.17@97.089,81.346 cw(c98.156,80.279) 98.156,81.788 cw(c98.156,83.297) P4.17@97.089,82.23 ; P9.4@104.968,80.203 ccw(c103.901,79.136) 103.901,80.645 ccw(c103.901,82.154) P9.4@104.968,81.087 ; P9.4@105.145,80.38 ccw(c104.505,79.74) 104.505,80.645 ccw(c104.505,81.55) P9.4@105.145,80.91 ; P9.4@105.707,80.416 cw(c106.172,80.058) 106.172,80.645 cw(c106.172,81.232) P9.4@105.707,80.874 ; P9.4@105.905,80.264 cw(c106.68,79.667) 106.68,80.645 ; P9.4@105.905,81.026 ccw(c106.68,81.623) 106.68,80.645 ; U3.1@111.342,72.374 109.834,72.374 108.331,73.877 108.331,78.994 106.68,80.645
"I2S WS": P4.11 P4.12 P9.2 U1.33 U3.3 | length 54.6
  Top Layer w0.25: P4.12@94.107,74.168 P4.11@96.647,74.168 100.584,74.168 101.981,75.565 P9.2@105.41,75.565 ; P4.12@94.372,73.903 cw(c95.012,73.263) 95.012,74.168 cw(c95.012,75.073) P4.12@94.372,74.433 ; P4.12@94.549,73.726 cw(c95.616,72.659) 95.616,74.168 cw(c95.616,75.677) P4.12@94.549,74.61 ; P4.11@96.205,73.726 ccw(c95.138,72.659) 95.138,74.168 ccw(c95.138,75.677) P4.11@96.205,74.61 ; P4.11@96.382,73.903 ccw(c95.742,73.263) 95.742,74.168 ccw(c95.742,75.073) P4.11@96.382,74.433 ; P4.11@96.912,73.903 cw(c97.552,73.263) 97.552,74.168 cw(c97.552,75.073) P4.11@96.912,74.433 ; P4.11@97.089,73.726 cw(c98.156,72.659) 98.156,74.168 cw(c98.156,75.677) P4.11@97.089,74.61 ; P9.2@104.968,75.123 ccw(c103.901,74.056) 103.901,75.565 ccw(c103.901,77.074) P9.2@104.968,76.007 ; P9.2@105.145,75.3 ccw(c104.505,74.66) 104.505,75.565 ccw(c104.505,76.47) P9.2@105.145,75.83
  Top Layer w0.254: U1.33@81.026,75.373 81.955,76.302 90.195,76.302 92.329,74.168 P4.12@94.107,74.168 ; P4.12@93.666,73.727 ccw(c92.603,72.664) 92.603,74.168 ccw(c92.603,75.672) P4.12@93.666,74.609 ; P4.12@93.846,73.907 ccw(c93.216,73.277) 93.216,74.168 ccw(c93.216,75.059) P4.12@93.846,74.429 ; P9.2@105.41,75.565 106.426,75.565 ; P9.2@105.965,75.282 cw(c106.426,75.048) 106.426,75.565 ; P9.2@105.965,75.848 ccw(c106.426,76.082) 106.426,75.565 ; U3.3@111.342,71.374 109.601,71.374 107.315,73.66 107.315,74.676 106.426,75.565
LED1: LED1.2 P4.7 P4.8 U1.29 | length 92.1
  Top Layer w0.25: P4.8@94.107,69.088 P4.7@96.647,69.088 ; P4.8@94.372,68.823 cw(c95.012,68.183) 95.012,69.088 cw(c95.012,69.993) P4.8@94.372,69.353 ; P4.8@94.549,68.646 cw(c95.616,67.579) 95.616,69.088 cw(c95.616,70.597) P4.8@94.549,69.53 ; P4.7@96.205,68.646 ccw(c95.138,67.579) 95.138,69.088 ccw(c95.138,70.597) P4.7@96.205,69.53 ; P4.7@96.382,68.823 ccw(c95.742,68.183) 95.742,69.088 ccw(c95.742,69.993) P4.7@96.382,69.353
  Top Layer w0.254: LED1.2@63.674,43.906 ccw(c62.866,44.714) 64.008,44.714 ccw(c65.15,44.714) LED1.2@64.342,43.906 ; LED1.2@64.008,43.572 64.008,44.831 68.072,48.895 v1(70.866,48.895) ; v1@70.708,48.737 ccw(c70.328,48.357) 70.328,48.895 ccw(c70.328,49.433) v1@70.708,49.053 ; v1(75.692,47.244) v1(80.137,47.244) ; v1@75.85,47.086 cw(c76.23,46.706) 76.23,47.244 cw(c76.23,47.782) v1@75.85,47.402 ; U1.29@79.966,71.837 81.113,70.69 87.933,70.69 89.535,69.088 P4.8@94.107,69.088 ; v1@79.979,47.086 ccw(c79.599,46.706) 79.599,47.244 ccw(c79.599,47.782) v1@79.979,47.402 ; P4.8@93.666,68.647 ccw(c92.603,67.584) 92.603,69.088 ccw(c92.603,70.592) P4.8@93.666,69.529 ; P4.8@93.846,68.827 ccw(c93.216,68.197) 93.216,69.088 ccw(c93.216,69.979) P4.8@93.846,69.349
  Bottom Layer w0.254: v1@70.866,48.672 cw(c70.866,48.134) 71.247,48.514 cw(c71.627,48.895) v1@71.089,48.895 ; v1(70.866,48.895) 72.517,47.244 v1(75.692,47.244) ; v1@75.534,47.086 ccw(c75.154,46.706) 75.154,47.244 ccw(c75.154,47.782) v1@75.534,47.402 ; v1(80.137,47.244) 82.169,47.244 83.439,48.514 83.439,53.141 83.426,53.154 83.426,61.328 85.598,63.5 90.171,63.5 91.059,64.388 91.059,67.818 92.329,69.088 P4.8@94.107,69.088 ; v1@80.295,47.086 cw(c80.675,46.706) 80.675,47.244 cw(c80.675,47.782) v1@80.295,47.402 ; P4.8@93.666,68.647 ccw(c92.603,67.584) 92.603,69.088 ccw(c92.603,70.592) P4.8@93.666,69.529 ; P4.8@93.846,68.827 ccw(c93.216,68.197) 93.216,69.088 ccw(c93.216,69.979) P4.8@93.846,69.349